# Altium PCB ch3v003f4p6.PcbDoc
Units mil, origin at the board's own origin, x right, y up, seen from the top; angles counter-clockwise.
Board outline 6000 x 4000 mil, 2 copper layers (Top Layer, Bottom Layer); 30 components, 34 nets, 125 pads, 19 vias.
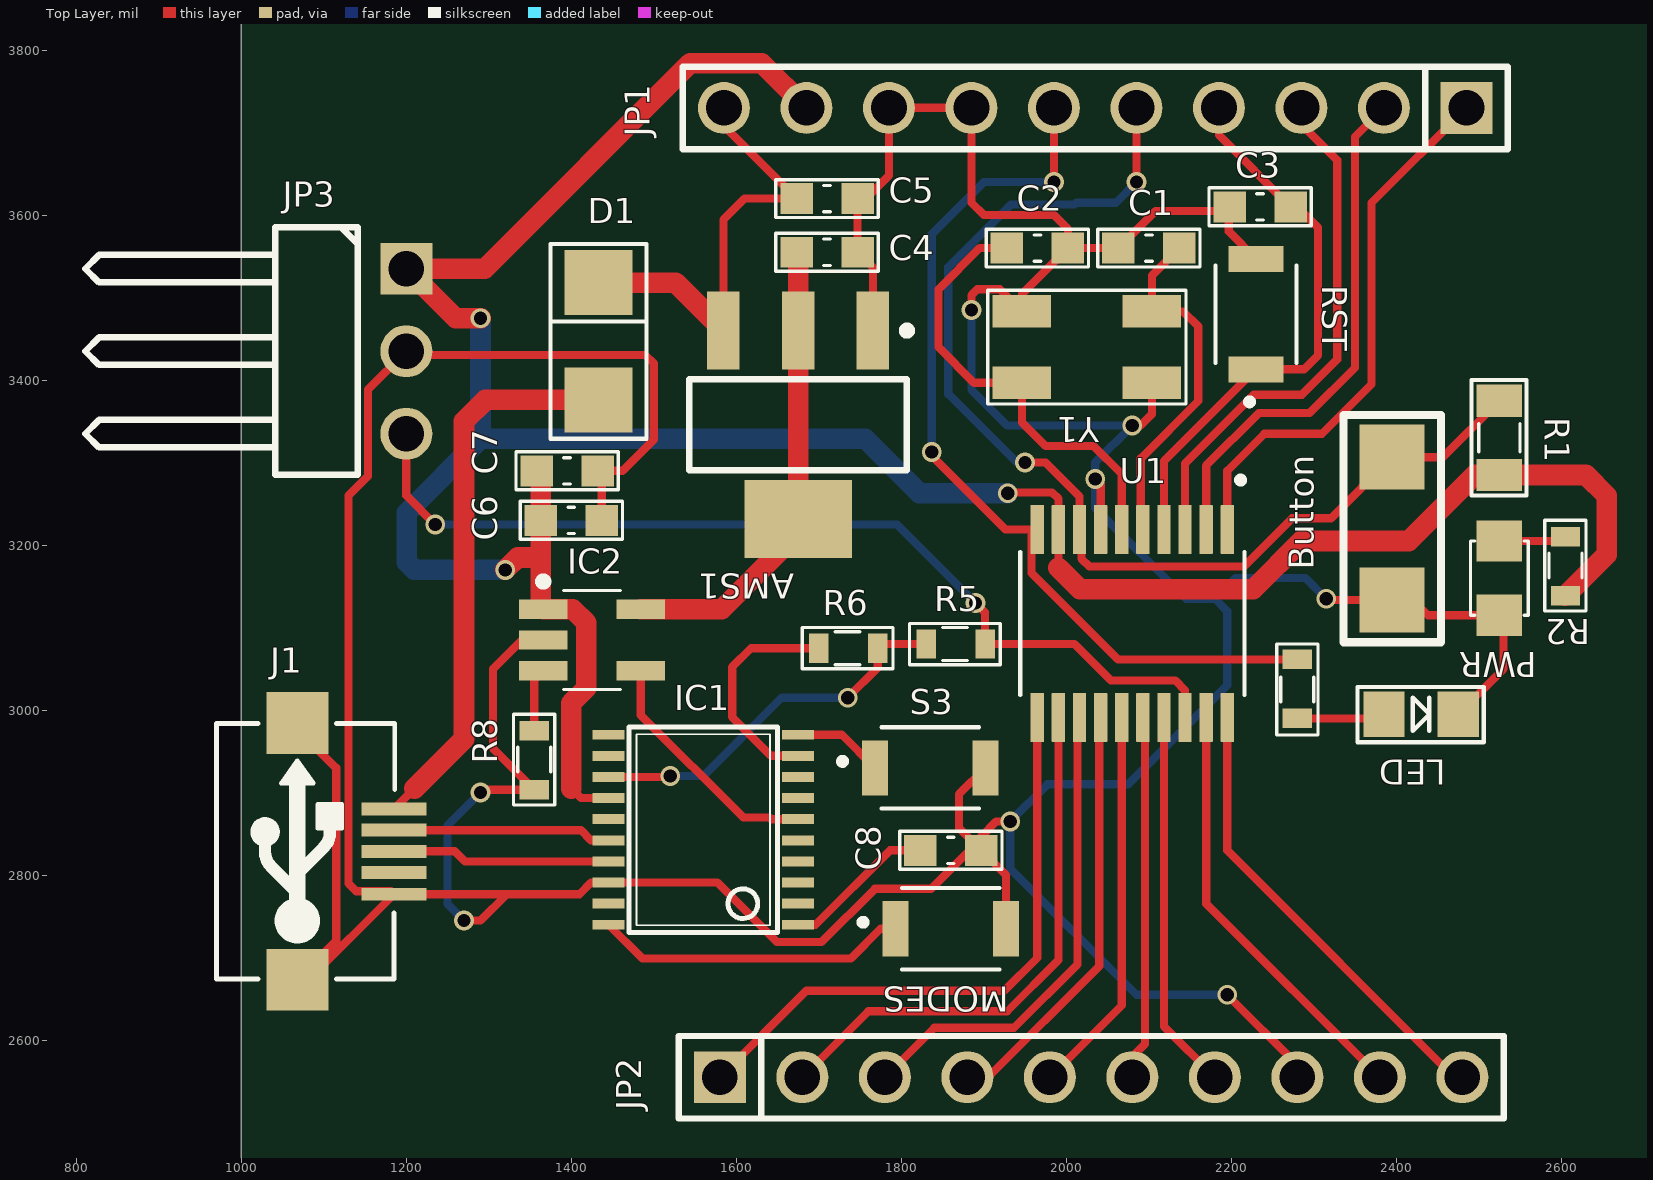
[diagram p0: Top Layer view]
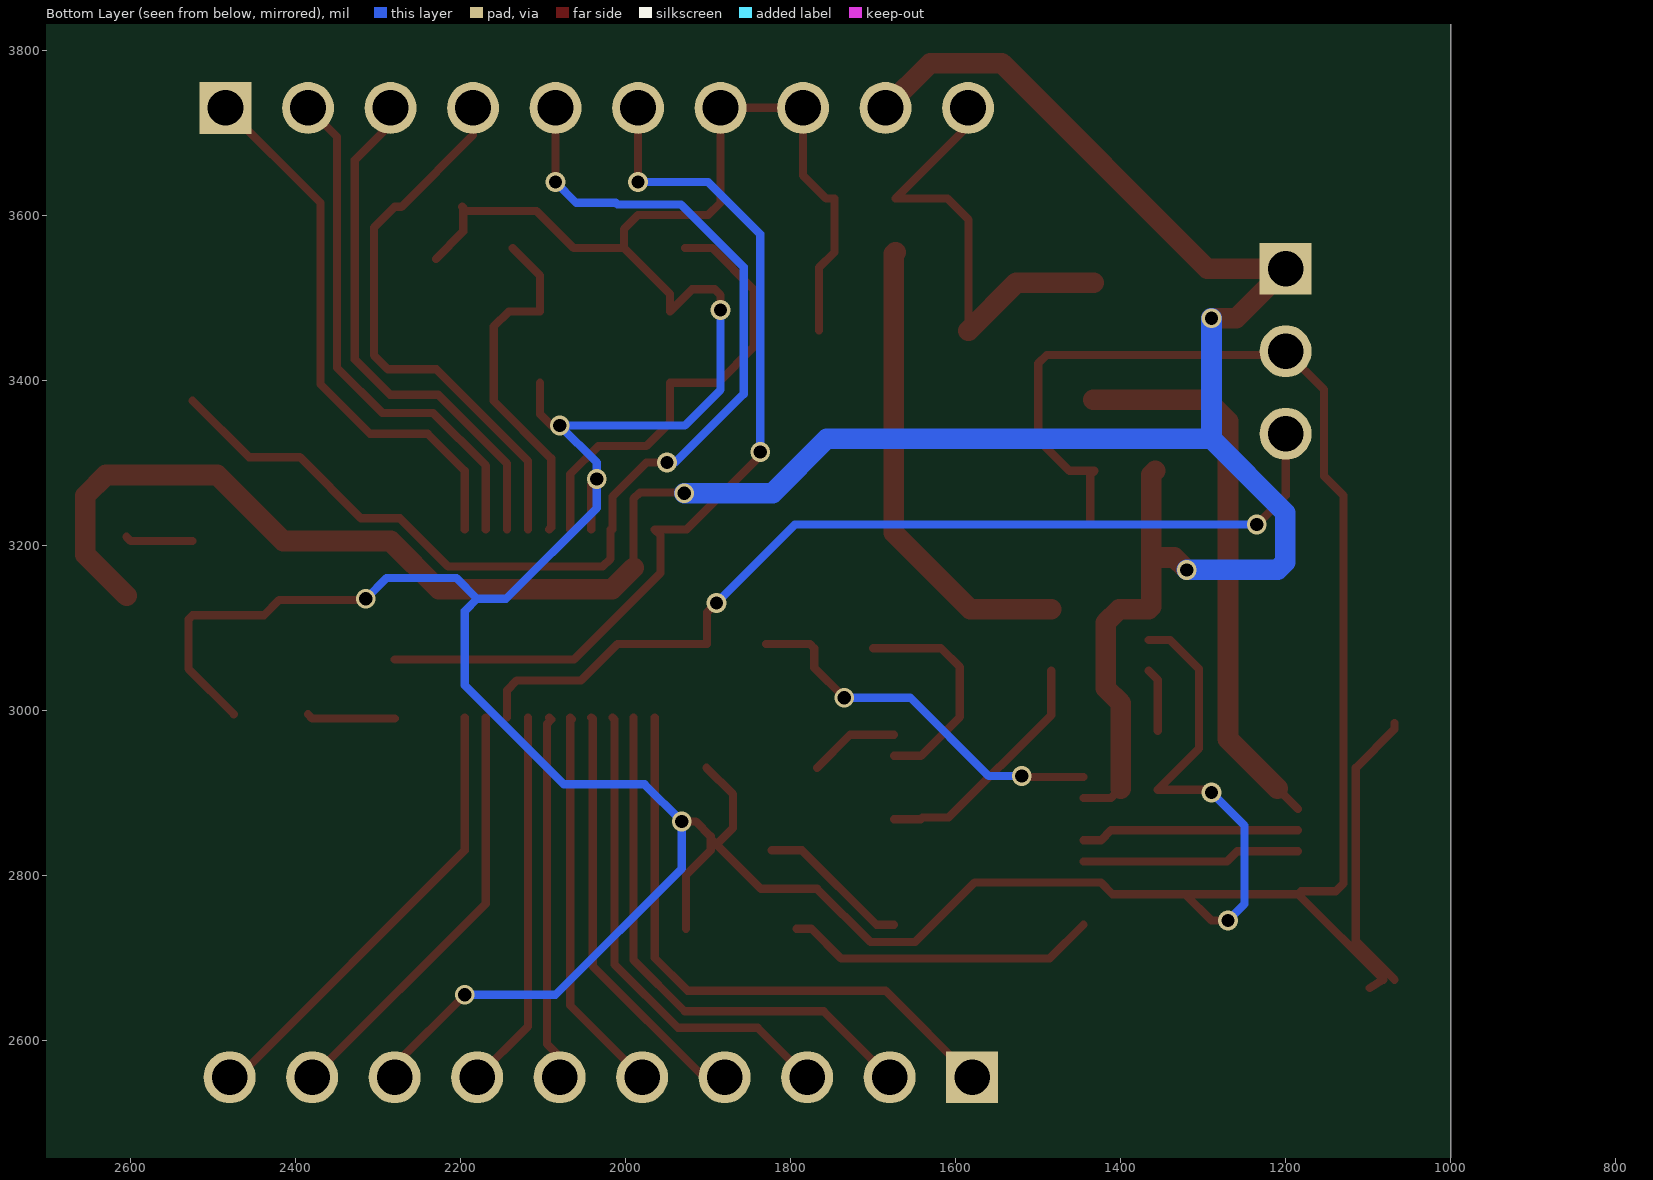
[diagram p1: Bottom Layer view, seen from below]
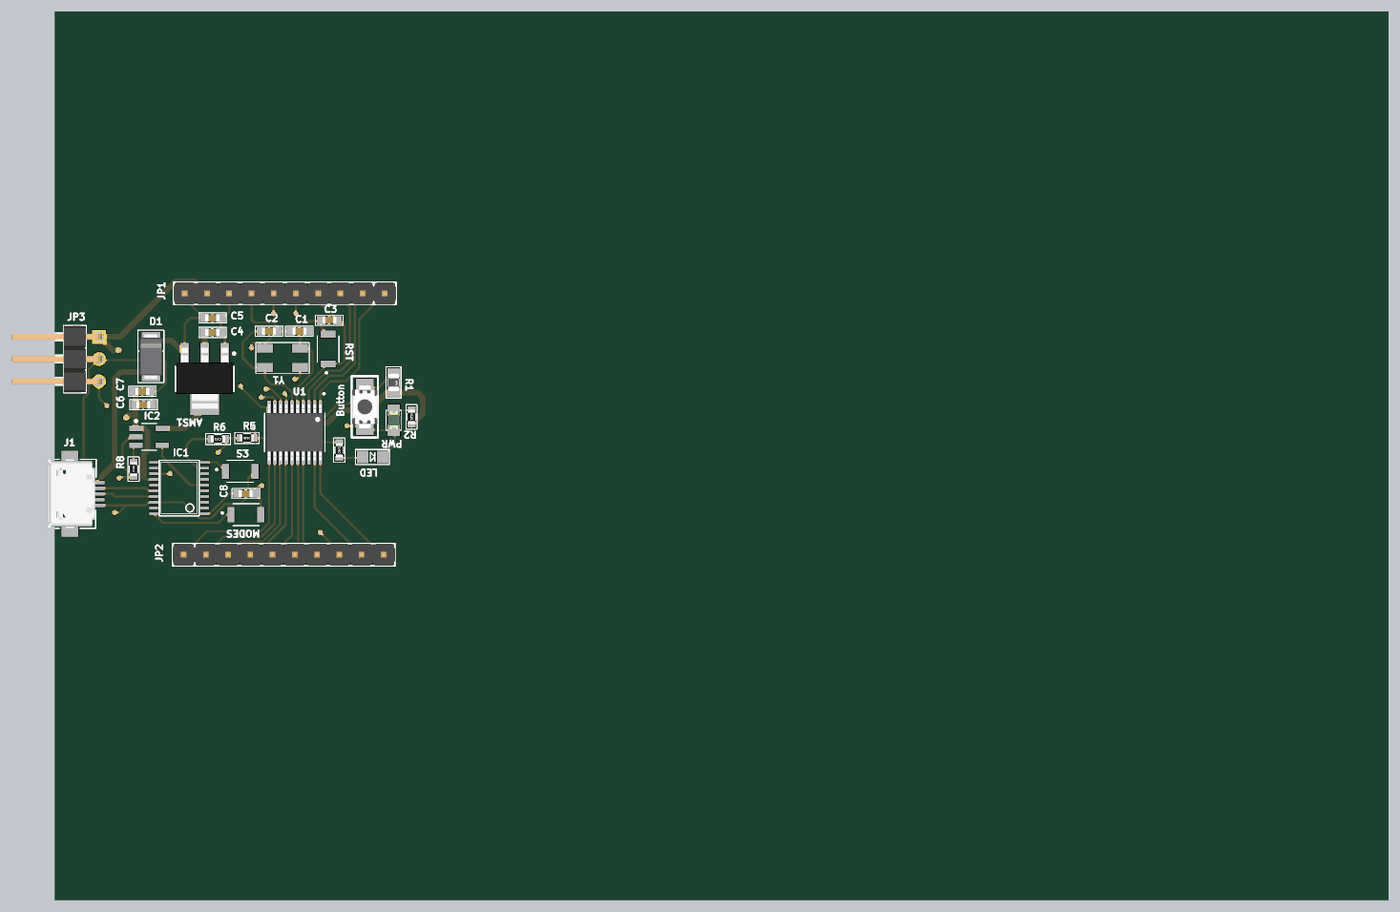
[diagram p2: 3D render of the assembled board from above, using the file's embedded part models]

## Layer stack, top to bottom
Top Solder: solder mask 0.4, Solder Resist, Dk 3.5
Top Layer: signal copper 1.4
Dielectric 1: dielectric 12.6, FR-4, Dk 4.8
Bottom Layer: signal copper 1.4
Bottom Solder: solder mask 0.4, Solder Resist, Dk 3.5

## Board outline
1000,1000 7000,1000 7000,5000 1000,5000

## Design rules (kind name [scope] priority, off if disabled: settings)
Clearance [All] p1: gap=10 ignorepadtopadclearanceinfootprint=TRUE
PolygonConnect [All] p1: connectstyle=Relief reliefconductorwidth=10 reliefentries=4 polygonreliefangle="90 Angle" airgapwidth=10
RoutingVias [All] p1: holewidth=16 width=24 viastyle="Through Hole" minholewidth=16 minwidth=24 maxholewidth=16 maxwidth=24
SolderMaskExpansion [All] p1: expansion=4
Width [All] p1: maxlimit=25 minlimit=10 preferedwidth=20 minimp=50.000000 maximp=50.000000 favimp=50.000000
30 further rules are at their usual default settings.

## Classes and differential pairs
component class ch32v003f4p6: AMS1 C1 C2 C3 C4 C5 C6 C7 C8 D1 IC1 J1 JP1 JP2 JP3 LED_POWER LED_USER R1 R2 R5 R6 R8 RST S3 U1 Y1

## Components (designator, comment, footprint, x,y, rotation, side; value= is the part's Value field where it differs from the comment)
AMS1 "AMS1117-3.3V" SOT223 1675,3345.83 r180 top value="AMS1117-3.3V SOT223"
Button "SW-SMD" "SW 3x2x4" 2395,3220 r270 top (schematic designator S2)
C1 "22pF" CAP_0603 2100,3560 r0 top value=33p
C2 "22pF" CAP_0603 1965,3560 r180 top value=33p
C3 "104" CAP_0603 2235,3610 r0 top value=33p
C4 "104" CAP_0603 1710,3555 r180 top value=33p
C5 "104" CAP_0603 1710,3620 r180 top value=33p
C6 "104" CAP_0603 1400,3230 r180 top value=33p
C7 "104" CAP_0603 1395,3290 r180 top value=33p
C8 "104" CAP_0603 1860,2830 r180 top value=33p
D1 "1N4007" DIO-214AC(SMA) 1435,3450 r270 top
IC1 "CH32V305FBP6" TSSOP-20 1560,2855 r90 top
IC2 "DIO7002BST5" SOT23-5 1425,3085 r0 top
J1 "USB-5" USB-M1 1185,2828.82 r90 top
JP1 "JP 1x10 2.54" "JP 1x10 DT" 2485,3730 r180 top
JP2 "JP 1x10 2.54" "JP 1x10 DT" 1580,2555 r0 top
JP3 "JP 1x3 2.54" "JP 1x3 DC" 1100,3285 r270 top
L1 "LED 0805" LED-0805-Green 2525,3205 r270 top
L2 "LED 0805" LED_RED_SMD_0805 2430,2995 r0 top
R1 "10k" RES_SMD_0805 2525,3330 r270 top value="R1/4W - 1K"
R2 "1k" RES-SMD-0603 2605,3175 r270 top value="R1/4W - 1K"
R3 "1k" RES-SMD-0603 2280,3025 r90 top value="R1/4W - 1K"
R5 "100R" RES-SMD-0603 1865,3080 r0 top value="R1/4W - 1K"
R6 "100R" RES-SMD-0603 1735,3075 r0 top value="R1/4W - 1K"
R8 "15k" RES-SMD-0603 1355,2940 r270 top value="R1/4W - 1K"
RST "B3U-1000P" SW_B3U-1000P 2230,3480 r90 top (schematic designator S1)
S3 "B3U-1000P" SW_B3U-1000P 1835,2930 r0 top
S4 "B3U-1000P" SW_B3U-1000P 1860,2735 r0 top
U1 "CH32V003F4P6" SOP65P640X121-20N 2080,3105 r270 top
Y1 "24MHz" "Crystal 4 pin SMD 50x32" 2025,3440 r180 top

## Footprints (in the part's own frame and the unit in brackets; to place one, negate y for a bottom-side part, rotate by r counter-clockwise, add the part's x,y. Pads: shape width x height; smd on the part's side, far side on the other; paste and mask are expansions set on the pad)
CAP_0603 [mm]
  rect 1x0.95 smd mask+0.076: 1(-0.94,0) 2(0.94,0)
  silkscreen extent -1.57,-0.58 1.57,0.58, body extent -0.77,-0.39 0.83,0.41, height 0.9
"Crystal 4 pin SMD 50x32" [mm] "Quartz Crystal, SM; Body 6.0 x 3.5 mm (LxW)"
  rect 1.8x1 smd: 1(-2,-1.1) 2(2,-1.1) 3(2,1.1) 4(-2,1.1)
  silkscreen extent -3.05,-1.75 3.05,1.75, body extent -2.48,-1.6 2.53,1.6, height 0.9
DIO-214AC(SMA) [mm] "DO-214AC Diode Smallest Size"
  rect 2x2.1 smd: 1(1.88,-0.051) 2(-1.732,-0.051)
  silkscreen extent -2.92,-1.52 3.07,1.42, body extent -2.5,-1.35 2.7,1.25, height 2.4
"JP 1x3 DC" [mm]
  rect 1.6x1.6 hole 1.1: 1(-6.35,2.54)
  round 1.6 hole 1.1: 2(-3.81,2.54) 3(-1.27,2.54)
  silkscreen extent -7.62,-7.34 0,1.04, body extent -7.62,-7.52 0,2.84, height 2.55
"JP 1x10 DT" [mm] "10 pins, 1 row, straight, gold plating"
  rect 1.6x1.6 hole 1.1: 1(0,0)
  round 1.6 hole 1.1: 2(2.54,0) 3(5.08,0) 4(7.62,0) 5(10.16,0) 6(12.7,0) 7(15.24,0) 8(17.78,0) 9(20.32,0) 10(22.86,0)
  silkscreen extent -1.27,-1.27 24.13,1.27, body extent -1.27,-1.27 24.13,1.27, height 8.54
LED-0805-Green [mil]
  rect 50x55 smd: 1(0,0) 2(90,0)
  silkscreen extent 0,-35 90,35, body extent 5,-25 85,25, height 43
LED_RED_SMD_0805 [mil]
  rect 50x55 smd: 1(-45,0) 2(45,0)
  silkscreen extent -77,-34 76,33, body extent -41,-27 41,27, height 35
RES-SMD-0603 [mm]
  rect 0.6x0.9 smd: 1(-0.889,0) 2(0.927,0)
  silkscreen extent -1.4,-0.64 1.4,0.64, body extent -0.8,-0.4 0.8,0.4, height 0.43
RES_SMD_0805 [mil]
  rect 39.37x55 smd: 1(-45,0) 2(45,0)
  silkscreen extent -70,-34 70,33, body extent -39,-25 39,25, height 31
SOP65P640X121-20N [mm]
  rrect12% 1.52x0.41 smd: 1(-2.895,2.925) 2(-2.895,2.275) 3(-2.895,1.625) 4(-2.895,0.975) 5(-2.895,0.325) 6(-2.895,-0.325) 7(-2.895,-0.975) 8(-2.895,-1.625) 9(-2.895,-2.275) 10(-2.895,-2.925) 11(2.895,-2.925) 12(2.895,-2.275) 13(2.895,-1.625) 14(2.895,-0.975) 15(2.895,-0.325) 16(2.895,0.325) 17(2.895,0.975) 18(2.895,1.625) 19(2.895,2.275) 20(2.895,2.925)
  silkscreen extent -4.51,-3.45 2.2,3.45, body extent -3.2,-3.25 3.2,3.25, height 1.1
SOT23-5 [mm] "SOT23, 5-Leads, Body 3.0x3.0mm (max), Pitch 0.95mm, IPC Medium Density"
  rect 1.5x0.6 smd: 1(-1.5,0.95) 2(-1.5,0) 3(-1.5,-0.95) 4(1.5,-0.95) 5(1.5,0.95)
  silkscreen extent -1.62,-1.52 0.87,1.92, body extent -1.75,-1.52 1.75,1.53, height 1.45
SOT223 [mm]
  rect 1x2.4 smd: 1(-2.3,-2.9) 2(0,-2.9) 3(2.3,-2.9)
  rect 3.3x2.4 smd: 4(0,2.9)
  silkscreen extent -3.48,-3.02 3.35,1.4, body extent -3.25,-3.56 3.25,3.4, height 1.68
"SW 3x2x4" [mm]
  rect 2x2 smd: 1(-2.2,0) 2(2.2,0)
  silkscreen extent -3.5,-1.5 3.5,1.5, body extent -2.45,-1.45 2.45,1.45, height 2
SW_B3U-1000P [mm]
  rect 0.8x1.7 smd: 1(-1.7,0) 2(1.7,0)
  silkscreen extent -2.8,-1.25 1.5,1.25
TSSOP-20 [mil] "TSSOP-20"
  rect 12x39 smd: 1(-115.16,-114.87) 2(-89.57,-114.87) 3(-63.98,-114.87) 4(-38.39,-114.87) 5(-12.8,-114.87) 6(12.8,-114.87) 7(38.39,-114.87) 8(63.98,-114.87) 9(89.57,-114.87) 10(115.16,-114.87) 11(115.16,114.87) 12(89.57,114.87) 13(63.98,114.87) 14(38.39,114.87) 15(12.8,114.87) 16(-12.8,114.87) 17(-38.39,114.87) 18(-63.98,114.87) 19(-89.57,114.87) 20(-115.16,114.87)
  silkscreen extent -125,-90 125,90
USB-M1 [mm]
  rect 0.4x2 smd: 1(1.3,0) 2(0.65,0) 3(0,0) 4(-0.65,0) 5(-1.321,0)
  rect 1.9x1.9 smd: 5(-3.95,2.968) 5(3.95,2.968)
  silkscreen extent -3.94,-0.03 3.94,5.46, body extent -3.98,0.11 4,5.54, height 2.71

## Part data
AMS1: library part "AMS1117 SMD", "Dán", Chung_Loai=Dán, Don_Vi=Con, Ma_Hang=MH000596
Button: "Switch", LatestRevisionDate=17-Jul-2002, LatestRevisionNote="Re-released for DXP Platform.", PackageReference=SPST-2, Published=24-Mar-1999, Publisher="Altium Limited"
C1 C2 C3 C4 C5 C6 C7 C8: library part CapSMD, "Capacitor", LatestRevisionDate=17-Jul-2002, LatestRevisionNote="Re-released for DXP Platform.", PackageReference=RAD-0.3, Published=8-Jun-2000, Publisher="Altium Limited"
D1: library part D1A, "Diode 1A"
IC2: library part "DIO7002BST5 SMD"
J1: Manufacturer=FCI, Manufacturer Part Number=10118193-0001LF, Supplier Part Number 1=609-4616-1-ND, .Checked PCB=RF, .Checked SCH=MM, .Creator=MM, Category="Connectors, Interconnects", ComponentLink1Description=http://portal.fciconnect.com/Comergent//fci/drawing/10118193.pdf, ComponentLink1URL=http://portal.fciconnect.com/Comergent//fci/drawing/10118193.pdf, Connector Type="USB - micro B", Features="Shielded, Solder Retention", Gender=Receptacle, Ingress Protection=-, Mounting Type="Surface Mount, Right Angle, Horizontal", Number of Contacts=5, Packaging="Cut Tape (CT)", Pricing 1="1=0.46, 10=0.433, 25=0.3712, 50=0.3156, 100=0.3032, 250=0.27224, 500=0.25988 (USD)", RoHS="RoHS Compliant", Specifications="USB 2.0", Stock 1=28642, Supplier 1=Digi-Key
JP1 JP2: library part "JP 1x10 2.54 Duc Thang", "C?m", Chung_Loai=C?m, Don_Vi=Con, Ma_Hang=MH000903, Ten_Linh_Kien="Jump Ðon Ð?c 2.54MM 1x40P Th?ng 11MM"
JP3: library part "JP 1x3 2.54 Duc Cong", "C?m", Chung_Loai=C?m, Don_Vi=Con, Ma_Hang=MH000904, Ten_Linh_Kien="Jump Ðon Ð?c 2.54MM 1x40P Cong Ð?ng"
L1 L2: library part "LED 0805 Xanh La", "Dán", Chung_Loai=Dán, Don_Vi=Con, Ma_Hang=MH002326, Ten_Linh_Kien="LED 0805 Màu Xanh Lá (Green)"
R1 R2 R3 R5 R6 R8: library part RES, "Resistor 1/4W"
RST S3 S4: "Switch Tactile N.O. SPST Round Button Gull Wing 0.05A 12VDC 1.5N SMD Embossed T/R", Package=None, Availability=Unavailable, MP=B3U-1000P, Price=None
U1: "Industrial-grade general-purpose microcontroller", Package=Package, Check_prices=https://www.snapeda.com/parts/CH32V003F4P6/WCH/view-part/?ref=eda, MF=WCH, MP=CH32V003F4P6, SnapEDA_Link=https://www.snapeda.com/parts/CH32V003F4P6/WCH/view-part/?ref=snap
Y1: library part "XTAL_4Pin SMD", "Crystal Oscillator", LatestRevisionDate=17-Jul-2002, LatestRevisionNote="Re-released for DXP Platform.", PackageReference=R38, Published=8-Jun-2000, Publisher="Altium Limited"

## Via types
v1: diameter 24, hole 16, Top Layer to Bottom Layer, 19 vias

## Nets (pads, with @x,y where several pads share a name; then routed paths per layer and width w, separated by ;. In a path a pad name is that pad's centre, name@x,y a point inside that pad or via, vN(x,y) a via of type N, cw(c..) or ccw(c..) an arc to the next point about the centre after c; other vN are vias at no path point)
3V3: C6.2 C7.2 IC1.14 IC2.1 JP1.9 JP3.1 R1.2 R2.2 U1.9 | length 3418.9
  Top Layer w10: 1400,2905 1411.61,2893.39 IC1.14 ; v1(1929,3262.92) 1929.98,3263.9 1982.82,3263.9 1990.43,3256.28 U1.9 1990.43,3172.63
  Top Layer w25: v1(1290,3475) 1260,3475 JP3.1 1295,3535 1544,3784 1631,3784 JP1.9 ; v1(1320,3170) 1335,3185 1363,3185 ; C7.2 1363,3285 C6.2 1363,3185 ; 1400,2905 1400,3008.5 1417.97,3026.47 1417.97,3106.13 1401.7,3122.4 IC2.1 1363,3125.35 1363,3185 ; 1990.43,3172.63 2016.51,3146.56 2226.56,3146.56 2285,3205 2415,3205 2495,3285 R1.2 2630,3285 2655,3260 2655,3188.51 R2.2
  Bottom Layer w25: v1(1290,3475) 1290,3328.79 ; v1(1320,3170) 1210,3170 1200.5,3179.5 1200.5,3239.29 1290,3328.79 ; v1(1929,3262.92) 1822.08,3262.92 1756.21,3328.79 1290,3328.79
3V3_IN: AMS1.2 AMS1.4 C4.2 IC2.5 | length 570.1
  Top Layer w25: IC2.5 1582.4,3122.4 1675,3215 AMS1.4 AMS1.2 1675,3553 C4.2
5V_IN: AMS1.3 C5.2 D1.2 JP1.10 | length 555.6
  Top Layer w10: AMS1.3 1584.45,3594.45 1610,3620 C5.2 1585,3708 JP1.10
  Top Layer w25: D1.2 1526.24,3518.2 AMS1.3
D+: IC1.17 J1.3 | length 265.2
  Top Layer w10: J1.3 1258.82,2828.82 1271.02,2816.61 IC1.17
D-: IC1.16 J1.2 | length 265.2
  Top Layer w10: J1.2 1411.8,2854.41 1424,2842.2 IC1.16
GND: AMS1.1 Button.2 C1.1 C2.1 C3.1 C4.1 C5.1 C6.1 C7.1 C8.1 IC1.18 IC2.2 J1.5 JP1.7 JP1.8 JP2.8 JP3.2 L1.2 L2.2 R8.2 RST.2 S3.2 S4.2 U1.7 Y1.2 Y1.4 | length 6812
  Top Layer w10: J1.5@1068.16,2673.31 1115,2720.15 1115,2930 1068.16,2976.84 J1.5@1068.16,2984.33 ; J1.5@1098.16,2663.31 1081.49,2673.31 J1.5@1185,2776.82 ; v1(1270,2745) 1290,2745 1321.82,2776.82 ; v1(1290,2900) 1293.51,2903.51 R8.2 1305,2953.52 1305,3050 1340,3085 IC2.2 ; C6.1 1437,3285 C7.1 1462,3290 1500,3328 1500,3420 1489.63,3430.37 1204.63,3430.37 JP3.2 1153.5,3388.5 1153.5,3283.5 1130,3260 1130,2789.77 1139.42,2780.35 1181.46,2780.35 J1.5@1185,2776.82 ; AMS1.1 1765.55,3536.45 C4.1 C5.1 1757,3620 1785,3648 JP1.8 JP1.7 1885,3615 1900,3600 1985,3600 2002,3583 C2.1 ; v1(1885,3485) 1885,3503 1892,3510 1919.57,3510 Y1.2 1946.26,3504.26 C2.1 ; S3.2 1870,2898.07 1870,2857 C8.1@1889.8,2837.2 ; S4.2 1926.93,2800.07 C8.1 C8.1@1897,2844.4 ; v1(1932,2865) 1915,2865 1897,2847 C8.1@1897,2844.4 ; v1(2035,3280) 2041.61,3273.39 U1.7 ; v1(2080,3345) 2090,3345 2103.74,3358.74 Y1.4 ; v1(2195,2655) 2280,2570 JP2.8 ; C3.1 C3.1@2196.93,3608.93 ; RST.2 2196.93,3580 C3.1@2196.93,3608.93 ; v1(2315,3135) 2316.61,3133.39 Button.2 2420,3133.39 2438.39,3115 L1.2 2530,3110 2530,3050 L2.2 ; J1.5@1185,2776.82 1321.82,2776.82 ; 1321.82,2776.82 1409.8,2776.82 1424,2791.02 IC1.18 1576.98,2791.02 1649.16,2718.84 1703.28,2718.84 1767.9,2783.46 1836.06,2783.46 C8.1@1889.8,2837.2 ; C8.1@1889.8,2837.2 C8.1@1897,2844.4 ; C2.1 C1.1 2108,3605 2193,3605 C3.1@2196.93,3608.93
  Bottom Layer w10: v1(1270,2745) 1250,2765 1250,2860 v1(1290,2900) ; v1(1885,3485) 1885,3388.28 1928.28,3345 v1(2080,3345) 2035,3300 v1(2035,3280) 2035,3245 2145,3135 2180,3135 ; v1(2195,2655) 2085,2655 1932,2808 v1(1932,2865) 1977,2910 2075,2910 2195,3030 2195,3120 2180,3135 ; v1(2315,3135) 2290,3160 2205,3160 2180,3135
IAP: IC1.10 S3.1 | length 109.8
  Top Layer w10: IC1.10 1727.91,2970.16 S3.1
MODES: IC1.20 S4.1 | length 379.9
  Top Layer w10: IC1.20 1486.13,2698.84 1738.84,2698.84 1775,2735 S4.1
NetC8_2: C8.2 IC1.1 | length 185.5
  Top Layer w10: IC1.1 1696,2739.84 1786.15,2830 C8.2
NetIC2_3: IC2.3 R8.1 | length 77.1
  Top Layer w10: R8.1 1355,3036.65 IC2.3
NetL1_1: L1.1 R2.1 | length 82.1
  Top Layer w10: L1.1 2600,3205 R2.1
NetL2_1: L2.1 R3.1 | length 107.1
  Top Layer w10: R3.1 2380,2990 L2.1
PB13: IC1.6 IC2.4 | length 296.6
  Top Layer w10: IC2.4 1484.06,2994.13 1608.46,2869.72 1640.37,2869.72 1642.3,2867.8 IC1.6
PC0: JP1.6 R3.2 U1.10 | length 1118.8
  Top Layer w10: v1(1837,3313) 1837,3308 1926.02,3218.98 U1.10 1957.95,3212.09 1957.95,3166.22 2062.68,3061.49 R3.2 ; v1(1985,3640) JP1.6
  Bottom Layer w10: v1(1837,3313) 1837,3577 1900,3640 v1(1985,3640)
PC1: JP2.1 U1.11 | length 736
  Top Layer w10: JP2.1 1685,2660 1925,2660 1964.84,2699.84 U1.11
PC2: JP2.2 U1.12 | length 663.3
  Top Layer w10: JP2.2 1760,2635 1928.43,2635 1990.43,2697 U1.12
PC3: JP2.3 U1.13 | length 590.4
  Top Layer w10: JP2.3 1840,2615 1936.72,2615 2013.5,2691.79 2013.5,2988.5 U1.13
PC4: JP2.4 U1.14 | length 517.6
  Top Layer w10: JP2.4 1905,2555 2040,2690 2040,2989.41 U1.14
PC5: JP2.5 U1.15 | length 475.3
  Top Layer w10: JP2.5 2067.2,2642.2 U1.15 U1.15@2065,2988.82
PC6: JP2.6 U1.16 | length 460
  Top Layer w10: JP2.6@2090.28,2565.28 JP2.6 2080,2580 2095.31,2595.31 2095.31,2983.46 2090.28,2988.5 U1.16
PC6_WCH: IC1.9 R6.1 | length 274.1
  Top Layer w10: IC1.9 1642.3,2944.57 1595,2991.87 1595,3052 1618,3075 R6.1
PC7: JP2.7 U1.17 | length 461.5
  Top Layer w10: U1.17 2118.39,2616.61 JP2.7
PD0: Button.1 JP1.5 R1.1 U1.8 | length 1396.7
  Top Layer w10: v1(1950,3300) 1975,3300 2016.02,3258.98 U1.8 2018.54,3218.98 2018.54,3183.41 2027.9,3174.06 2215.16,3174.06 2273.61,3232.5 2320.89,3232.5 Button.1 2456.62,3306.61 R1.1 ; v1(2085,3640) JP1.5
  Bottom Layer w10: v1(1950,3300) 1940,3300 1857,3383 1857,3537 1933,3613 2010,3613 2012,3615 2060,3615 v1(2085,3640)
PD2: JP2.9 U1.19 | length 523.2
  Top Layer w10: U1.19 2169.57,2765.43 JP2.9
PD3: JP2.10 U1.20 | length 559.9
  Top Layer w10: U1.20 2195.16,2829.84 2470,2555 JP2.10
PD4: JP1.1 U1.1 | length 672.1
  Top Layer w10: U1.1 2195.16,3290.16 2240,3335 2310,3335 2370,3395 2370,3615 JP1.1
PD5: JP1.2 U1.2 | length 636.4
  Top Layer w10: U1.2 2169.57,3296.28 2233.28,3360 2295,3360 2350,3415 2350,3695 JP1.2
PD6: JP1.3 U1.3 | length 639.4
  Top Layer w10: U1.3 2143.98,3298.98 2227.32,3382.32 2285.61,3382.32 2328.28,3425 2328.28,3666.72 2285,3710 JP1.3
RST: C3.2 JP1.4 RST.1 U1.4 | length 677.1
  Top Layer w10: U1.4 2118.39,3302.02 2229.43,3413.07 RST.1 2288.07,3413.07 2305,3430 2305,3585 2280,3610 C3.2 2185,3697 JP1.4
SWDIO: IC1.13 R5.1 R6.2 | length 467.4
  Top Layer w10: IC1.13 1521.02,2918.98 v1(1520,2920) ; v1(1735,3015) 1771.49,3051.49 R6.2 1776.48,3080 R5.1
  Bottom Layer w10: v1(1520,2920) 1560,2920 1655,3015 v1(1735,3015)
SWIO: JP3.3 R5.2 U1.18 | length 1172.3
  Top Layer w10: JP3.3 1200,3260 v1(1235,3225) ; v1(1890,3130) 1901.49,3118.51 R5.2 2010,3080 2054.06,3035.94 2132.1,3035.94 2143.98,3024.07 U1.18
  Bottom Layer w10: v1(1235,3225) 1795,3225 v1(1890,3130)
VCC: D1.1 J1.1 | length 679
  Top Layer w10: J1.1 1210,2905
  Top Layer w25: 1210,2905 1270,2965 1270,3350 1296,3376 D1.1
X0: C2.2 U1.6 Y1.3 | length 554.8
  Top Layer w10: C2.2 1895,3560 1845,3510 1845,3440 1888.31,3396.69 Y1.3 1946.26,3348.74 1975,3320 2033.18,3320 2067.2,3285.98 U1.6
XI: C1.2 U1.5 Y1.1 | length 430.3
  Top Layer w10: U1.5 2090.28,3221.5 2090.28,3305.28 2160,3375 2160,3465 2141.69,3483.31 Y1.1 2103.74,3526.74 C1.2
pads on no net: IC1.2 IC1.3 IC1.4 IC1.5 IC1.7 IC1.8 IC1.11 IC1.12 IC1.15 IC1.19 J1.4

## Silkscreen, mask and mechanical layers (free items; w line width, h text height)
Top Overlay:
  text "PWR" at 2570,3070 h30 r180
  text "LED" at 2460,2940 h30 r180
  text "MODES" at 1930,2665 h30 r180